# EAGLE board snarfbasev4a (EAGLE 6.4)
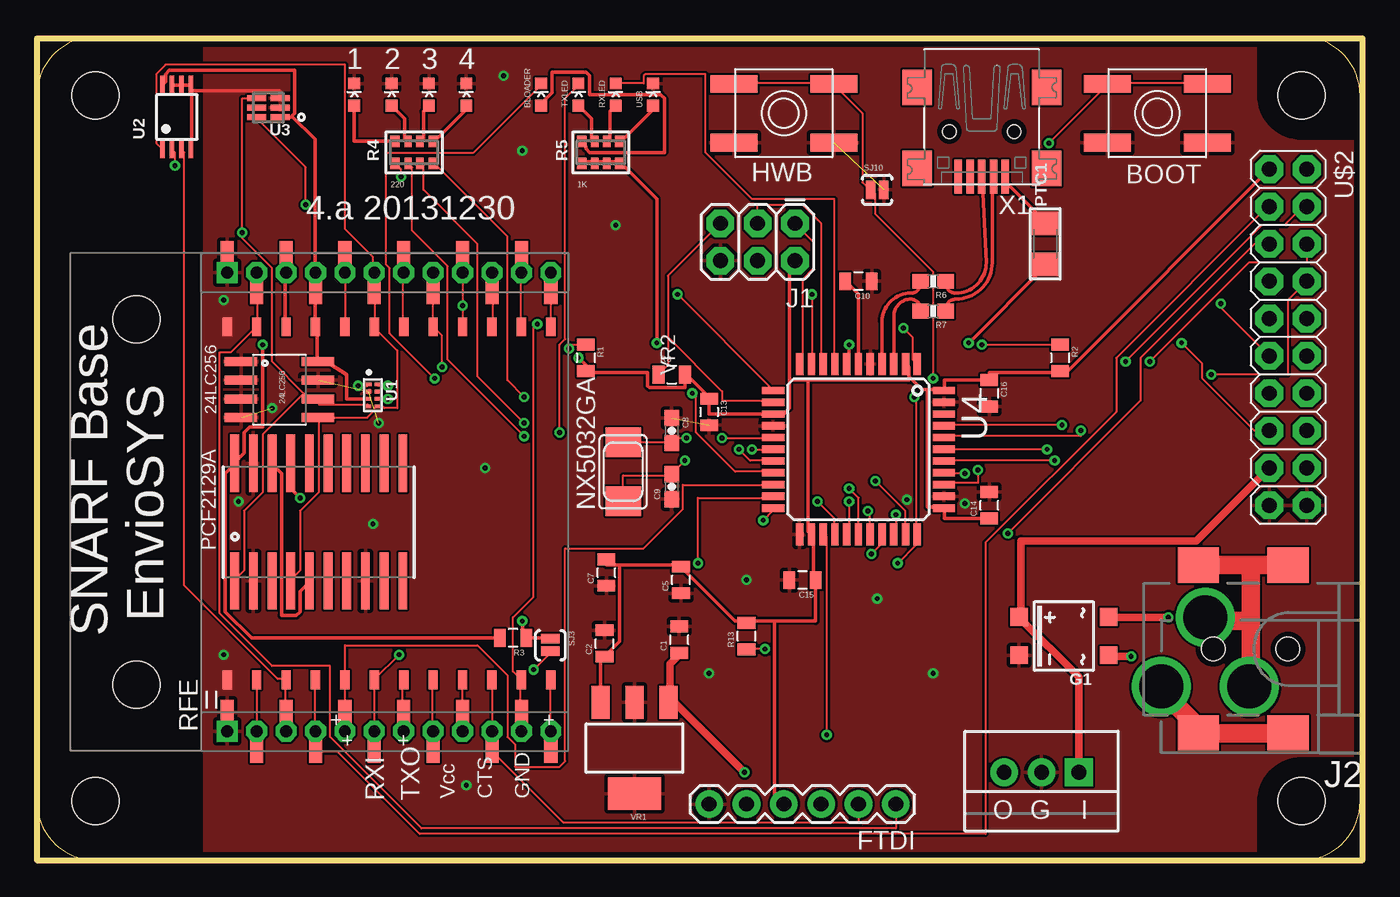
[diagram p0: board, top side]
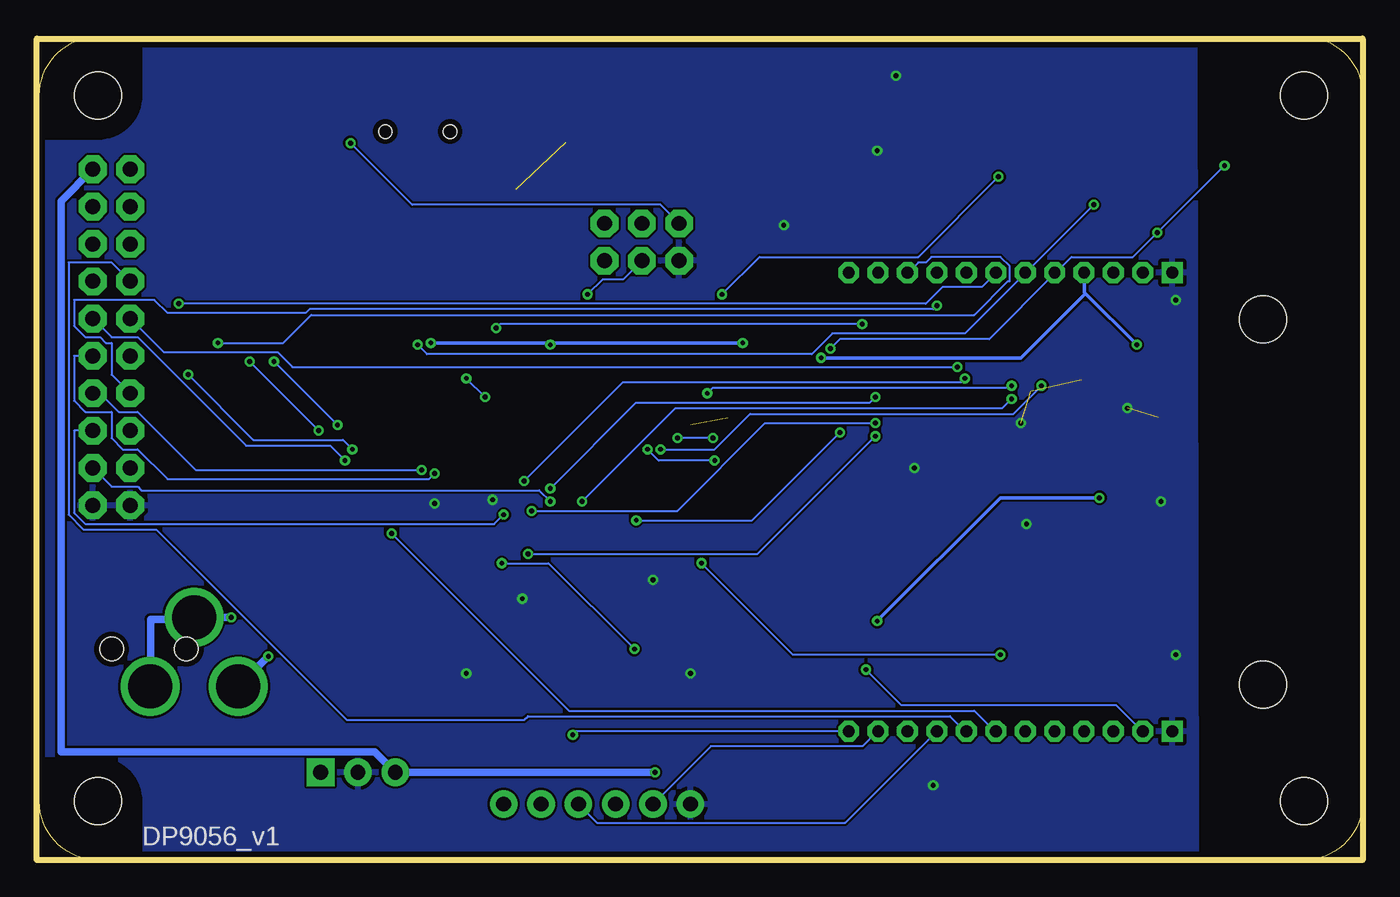
[diagram p1: board, bottom side, seen from below]

Size 90.17 x 55.88 mm. Coordinates in mm from the lower left corner, seen from the top.
Outline: 0,0 90.17,0 90.17,55.88 0,55.88 0,0
Copper layers (1*16): Top 0.0356mm / dielectric 1.5011mm / Bottom 0.0356mm
Design rules "LaenPCBOrder-JCModified": minimum track width 6mil, minimum drill 13mil, track to track 6mil, track to pad 6mil, pad to pad 6mil, via to via 6mil, smd to smd 6mil, copper to edge 15mil, drill to drill 6mil, minimum pad ring 12mil, minimum via ring 7mil, stop-mask expansion 4mil, vias tented up to drill 25mil, thermal gap 10mil
Net classes: 0 default: width 0.254 mm; 1 smallsignal: width 0.152 mm; 2 Power: width 0.508 mm; 3 medsignal: width 0.203 mm

## Footprints (pad centres in the part's own frame; a part is rotated, then mirrored left to right if it is on the bottom)
LED-0603 = smd 0.8 x 0.8: A 0,-0.75; C 0,0.75
SO08 = smd 0.61 x 2.21: 1 -1.905,-2.616; 2 -0.635,-2.616; 3 0.635,-2.616; 4 1.905,-2.616; 5 1.905,2.616; 6 0.635,2.616; 7 -0.635,2.616; 8 -1.905,2.616
EVQ-Q2 = smd 3.2 x 1.2: A -3.4,-2; A' 3.4,-2; B -3.4,2; B' 3.4,2
0805 = smd 0.8 x 1.2: 1 -0.9,0; 2 0.9,0
0603-CAP = smd 1.1 x 1: 1 -0.85,0; 2 0.85,0
1X06 = drill 1.016 pad 1.88: 1 0,0; 2 2.54,0; 3 5.08,0; 4 7.62,0; 5 10.16,0; 6 12.7,0
SOIC-4 = smd 1.2 x 1.2: + 1.3,3.05; - -1.3,3.05; ~1 -1.3,-3.05; ~2 1.3,-3.05
TO220-MURATA = drill 1 pad 1.88: GND 0,0; OUT 2.54,0 | drill 1 pad 1.88 square: IN -2.54,0
2X3 = drill 1.016 pad 1.88 octagon: 1 0,0; 2 0,2.54; 3 2.54,0; 4 2.54,2.54; 5 5.08,0; 6 5.08,2.54
POWER_JACK_COMBO = drill 2.997: GND 5.62,-2.16; GND@1 2.62,2.54; POWER 8.62,2.54 | smd 2.8 x 2.4: GND@3 0,-5.7; GND@4 6.1,-5.7; POWER@1 0,5.7; POWER@2 6.1,5.7 | hole 1.6: 0,0; 5.08,0
NX5032 = smd 2 x 2.4: P$1 2,0; P$2 -2,0
SO20W = smd 0.6 x 3.9: P$1 -5.715,-4; P$2 -4.445,-4; P$3 -3.175,-4; P$4 -1.905,-4; P$5 -0.635,-4; P$6 0.635,-4; P$7 1.905,-4; P$8 3.175,-4; P$9 4.445,-4; P$10 5.715,-4; P$11 5.715,4; P$12 4.445,4; P$13 3.175,4; P$14 1.905,4; P$15 0.635,4; P$16 -0.635,4; P$17 -1.905,4; P$18 -3.175,4; P$19 -4.445,4; P$20 -5.715,4
1206 = smd 1.6 x 1.8: 1 -1.4,0; 2 1.4,0
RESPACK_4X0603 = smd 0.65 x 0.8: 1 -1.3,-0.75; 4 1.3,-0.75; 5 1.3,0.75; 8 -1.3,0.75 | smd 0.5 x 0.8: 2 -0.4,-0.75; 3 0.4,-0.75; 6 0.4,0.75; 7 -0.4,0.75
0603-RES = smd 1.1 x 1: 1 -0.85,0; 2 0.85,0
SYNAPSERFENGINE-THM-SMT-JACK2 = drill 0.8 square: 1 0,0; 24 31.2,0 | drill 0.8 pad 1.422 octagon: 2 0,-2; 3 0,-4; 4 0,-6; 5 0,-8; 6 0,-10; 7 0,-12; 8 0,-14; 9 0,-16; 10 0,-18; 11 0,-20; 12 0,-22; 13 31.2,-22; 14 31.2,-20; 15 31.2,-18; 16 31.2,-16; 17 31.2,-14; 18 31.2,-12; 19 31.2,-10; 20 31.2,-8; 21 31.2,-6; 22 31.2,-4; 23 31.2,-2 | smd 1.67 x 0.89: P1 1.3,0; P2 -1.3,-2; P3 1.3,-4; P4 -1.3,-6; P5 1.3,-8; P6 -1.3,-10; P7 1.3,-12; P8 -1.3,-14; P9 1.3,-16; P10 -1.3,-18; P11 1.3,-20; P12 -1.3,-22; P13 29.9,-22; P14 32.5,-20; P15 29.9,-18; P16 32.5,-16; P17 29.9,-14; P18 32.5,-12; P19 29.9,-10; P20 32.5,-8; P21 29.9,-6; P22 32.5,-4; P23 29.9,-2; P24 32.5,0 | smd 1.27 x 0.635: P201 3.5,0; P202 3.5,-2; P203 3.5,-4; P204 3.5,-6; P205 3.5,-8; P206 3.5,-10; P207 3.5,-12; P208 3.5,-14; P209 3.5,-16; P210 3.5,-18; P211 3.5,-20; P212 3.5,-22; P213 27.5,-22; P214 27.5,-20; P215 27.5,-18; P216 27.5,-16; P217 27.5,-14; P218 27.5,-12; P219 27.5,-10; P220 27.5,-8; P221 27.5,-6; P222 27.5,-4; P223 27.5,-2; P224 27.5,0 | hole 3.2: 3.17,6.16; 28.03,6.16
SJ_2S-NOTRACE = smd 0.635 x 1.27: 1 -0.45,0; 2 0.4,0
SJ_2S-NO = smd 0.635 x 1.27: 1 -0.45,0; 2 0.45,0
SOT833-1 = smd 0.4 x 0.25: 1 0.275,-0.75 | smd 0.35 x 0.25: 2 0.3,-0.25; 3 0.3,0.25; 4 0.3,0.75; 5 -0.3,0.75; 6 -0.3,0.25; 7 -0.3,-0.25; 8 -0.3,-0.75
TSSOP8 = smd 1.2 x 0.305: 1 -2.2,0.975; 2 -2.2,0.325; 3 -2.2,-0.325; 4 -2.2,-0.975; 5 2.2,-0.975; 6 2.2,-0.325; 7 2.2,0.325; 8 2.2,0.975
TSL2561_FN = smd 1.3 x 0.4: ADR -0.8,0; CLK 0.8,-0.65; DATA 0.8,0.65; INT 0.8,0; VDD -0.8,0.65; VSS -0.8,-0.65
TQFP44 = smd 1.5 x 0.5: 1 -5.8,4; 2 -5.8,3.2; 3 -5.8,2.4; 4 -5.8,1.6; 5 -5.8,0.8; 6 -5.8,0; 7 -5.8,-0.8; 8 -5.8,-1.6; 9 -5.8,-2.4; 10 -5.8,-3.2; 11 -5.8,-4; 23 5.8,-4; 24 5.8,-3.2; 25 5.8,-2.4; 26 5.8,-1.6; 27 5.8,-0.8; 28 5.8,0; 29 5.8,0.8; 30 5.8,1.6; 31 5.8,2.4; 32 5.8,3.2; 33 5.8,4 | smd 0.5 x 1.5: 12 -4,-5.8; 13 -3.2,-5.8; 14 -2.4,-5.8; 15 -1.6,-5.8; 16 -0.8,-5.8; 17 0,-5.8; 18 0.8,-5.8; 19 1.6,-5.8; 20 2.4,-5.8; 21 3.2,-5.8; 22 4,-5.8; 34 4,5.8; 35 3.2,5.8; 36 2.4,5.8; 37 1.6,5.8; 38 0.8,5.8; 39 0,5.8; 40 -0.8,5.8; 41 -1.6,5.8; 42 -2.4,5.8; 43 -3.2,5.8; 44 -4,5.8
2X10 = drill 1.016 pad 1.88 octagon: 1 -11.43,-1.27; 2 -11.43,1.27; 3 -8.89,-1.27; 4 -8.89,1.27; 5 -6.35,-1.27; 6 -6.35,1.27; 7 -3.81,-1.27; 8 -3.81,1.27; 9 -1.27,-1.27; 10 -1.27,1.27; 11 1.27,-1.27; 12 1.27,1.27; 13 3.81,-1.27; 14 3.81,1.27; 15 6.35,-1.27; 16 6.35,1.27; 17 8.89,-1.27; 18 8.89,1.27; 19 11.43,-1.27; 20 11.43,1.27
DP9056_V1 = hole 3.2: 4,4; 86,4; 86,52; 4,52
SOT223 = smd 1.219 x 2.235: 1 -2.311,-3.099; 2 0,-3.099; 3 2.311,-3.099 | smd 3.6 x 2.2: 4 0,3.099
USB-MINIB = smd 0.5 x 2.308: D+ 0,4.064; D- -0.8,4.064; GND 1.6,4.064; ID 0.8,4.064; VBUS -1.6,4.064 | smd 2 x 2.4: GND1 -4.4,-2; GND2 -4.4,3.5; GND3 4.4,3.5; GND4 4.4,-2 | hole 0.9: -2.2,1; 2.2,1

## Placement (x,y rotation side)
1  red  [LED-0603]  21.59,52.07 0 top
2  red  [LED-0603]  24.13,52.07 0 top
3  red  [LED-0603]  26.67,52.07 0 top
4  red  [LED-0603]  29.21,52.07 0 top
24LC256  24LC256T-I/SN  [SO08]  16.51,32 270 top
BLOADER  RED  [LED-0603]  34.29,52.07 0 top
BOOT  EVQQ2  [EVQ-Q2]  76.2,50.8 180 top
C1  1uF  [0805]  43.69,14.99 90 top
C2  1uF  [0805]  38.61,14.73 90 top
C5  1uF  [0805]  43.81,19.05 90 top
C7  10uF  [0805]  38.73,19.56 90 top
C8  12pF  [0603-CAP]  43.18,29.21 270 top
C9  12pF  [0603-CAP]  43.18,25.4 90 top
C10  1uF  [0805]  55.88,39.37 180 top
C13  1uF  [0805]  45.72,30.48 270 top
C14  1uF  [0805]  64.77,24.13 90 top
C15  1uF  [0805]  52.07,19.05 180 top
C16  1uF  [0805]  64.77,31.75 270 top
FTDI  [1X06]  58.42,3.81 180 top
G1  [SOIC-4]  69.85,15.24 90 top
HWB  EVQQ2  [EVQ-Q2]  50.8,50.8 180 top
IC1  [TO220-MURATA]  68.33,5.97 180 top
J1  AVR_SPI_PRG_6PTH  [2X3]  51.56,43.31 180 top
J2  POWER_JACKCOMBO  [POWER_JACK_COMBO]  85.09,14.35 180 top
NX5032GA  8MHz  [NX5032]  39.88,26.42 90 top
PCF2129A  PCF2129ASO20  [SO20W]  19.18,22.99 0 top
PTC1  [1206]  68.58,41.91 90 top
R1  [0805]  37.34,34.16 270 top
R2  [0805]  69.6,34.16 270 top
R3  10k  [0805]  32.38,15.11 180 top
R4  220  [RESPACK_4X0603]  25.65,48.13 0 top
R5  1K  [RESPACK_4X0603]  38.35,48.13 0 top
R6  22  [0603-RES]  60.96,39.37 180 top
R7  22  [0603-RES]  60.96,37.34 180 top
R8  10K  [0805]  43.18,33.02 0 top
R13  10K  [0805]  48.26,15.24 90 top
RFE  RFE  [SYNAPSERFENGINE-THM-SMT-JACK2]  12.95,8.76 90 top
RXLED  yellow  [LED-0603]  39.37,52.07 0 top
SJ3  SOLDERJUMPERNC2  [SJ_2S-NOTRACE]  34.92,14.61 270 top
SJ10  HWB  [SJ_2S-NO]  57.15,45.59 0 top
TXLED  yellow  [LED-0603]  36.83,52.07 0 top
U1  [SOT833-1]  22.86,31.62 180 top
U2  lm75adp  [TSSOP8]  9.53,50.55 90 top
U3  TSL2561_DFN  [TSL2561_FN]  15.75,51.18 180 top
U4  ATMEGA32U4-AU  [TQFP44]  55.88,27.94 270 top
U$2  M10X2  [2X10]  85.09,35.56 270 top
U$3  [DP9056_V1]  0,0 0 top
USB  GREEN  [LED-0603]  41.91,52.07 0 top
VR1  MCP1826S  [SOT223]  40.64,7.62 180 top
X1  USBSMD  [USB-MINIB]  64.26,50.55 180 top

## Library data of the parts
1-4 BLOADER C1 C2 C5 C7 C10 C13-C16 PCF2129A R6 R7 RFE RXLED TXLED USB X1 = 0_jc-custom
24LC256 C8 C9 FTDI J1 R3 SJ3 SJ10 = SparkFun
BOOT HWB = adaprog
G1 PTC1 R4 R5 U1-U3 = microbuilder
IC1 = 0_jc-custom-eagle6
J2 U$2 = SparkFun-Connectors
NX5032GA U4 = adafruit
R1 R2 R8 R13 = SparkFun-Resistors
U$3 = dp_pcb
VR1 = SparkFun-PowerIC

## Nets
AREF-7: U4.42
ARXLED [smallsignal]: RXLED.C U4.8
ATXLED [smallsignal]: TXLED.C U4.22
GND: 1.C 2.C 3.C 4.C 24LC256.1 24LC256.2 24LC256.3 24LC256.4 24LC256.7 BOOT.B BOOT.B' C1.2 C2.2 C5.1 C7.1 C8.1 C9.1 C10.1 C13.2 C14.2 C15.2 C16.2 FTDI.6 G1.- HWB.B HWB.B' IC1.GND J1.6 PCF2129A.P$2 PCF2129A.P$8 PCF2129A.P$19 RFE.1 RFE.24 RFE.P1 RFE.P24 RFE.P201 RFE.P224 SJ10.2 U1.2 U2.4 U2.5 U2.6 U2.7 U3.ADR U3.VSS U4.5 U4.15 U4.23 U4.35 U4.43 U$2.19 U$2.20 USB.C VR1.2 VR1.4
GPIO0 [smallsignal]: RFE.2 RFE.P2 RFE.P202 SJ3.2
GPIO1 [smallsignal]: RFE.3 RFE.P3 RFE.P203 U2.3
GPIO2 [smallsignal]: RFE.4 RFE.P4 RFE.P204 U$2.3
GPIO5 [smallsignal]: RFE.7 RFE.P7 RFE.P207 U$2.5
GPIO6 [smallsignal]: RFE.8 RFE.P8 RFE.P208 U$2.7
GPIO11 [smallsignal]: RFE.13 RFE.P13 RFE.P213
GPIO12 [smallsignal]: RFE.14 RFE.P14 RFE.P214
GPIO13 [smallsignal]: RFE.15 RFE.P15 RFE.P215 U$2.15
GPIO14 [smallsignal]: RFE.16 RFE.P16 RFE.P216 U$2.13
GPIO15 [smallsignal]: RFE.17 RFE.P17 RFE.P217 U$2.9
GPIO16 [smallsignal]: RFE.18 RFE.P18 RFE.P218 U$2.11
GPIO19: RFE.22 RFE.P22 RFE.P222
HWB [smallsignal]: HWB.A HWB.A' R13.1 SJ10.1 U4.33
IFS: PCF2129A.P$5 PCF2129A.P$18
LINT: U3.INT
MISO [smallsignal]: J1.1 U4.11
MOSI [smallsignal]: J1.4 U4.10
N$1: 1.A R4.8
N$2: 2.A R4.7
N$3 [Power]: G1.~1 J2.POWER
N$4: C10.2 U4.6
N$5: BLOADER.A R5.8
N$6: 3.A R4.6
N$7 [Power]: G1.~2 J2.GND J2.GND@1
N$8: R5.7 TXLED.A
N$9: R5.6 RXLED.A
N$10: R5.5 USB.A
N$11: X1.GND
N$12: 4.A R4.5
PB4-L4-D8 [smallsignal]: R4.4 U4.28
PB5-L3-D9 [smallsignal]: R4.3 U4.29
PB6-L2-D10 [smallsignal]: R4.2 U4.30
PB7-L1-D11 [smallsignal]: R4.1 U4.12
PC6-D5 [smallsignal]: U4.31 U$2.16
PC7-D13-LED9BLOAD [smallsignal]: BLOADER.C U4.32
PD4-D4-GPIO10 [smallsignal]: RFE.12 RFE.P12 RFE.P212 U4.25
PD6-D12-I2COE [smallsignal]: U1.6 U4.26
PD7-D6 [smallsignal]: U4.27 U$2.18
PE6-D7-GPIO9 [smallsignal]: FTDI.5 RFE.11 RFE.P11 RFE.P211 U4.1
PF0-A5 [smallsignal]: U4.41 U$2.4
PF1-A4 [smallsignal]: U4.40 U$2.6
PF4-A3 [smallsignal]: U4.39 U$2.8
PF5-A2 [smallsignal]: U4.38 U$2.10
PF6-A1 [smallsignal]: U4.37 U$2.12
PF7-A0 [smallsignal]: U4.36 U$2.14
R6: PCF2129A.P$17 R3.1 SJ3.1
RESET_L [smallsignal]: FTDI.1 RFE.23 RFE.P23 RFE.P223
RST [smallsignal]: BOOT.A BOOT.A' J1.5 R8.1 U4.13
RX1 [smallsignal]: RFE.6 RFE.P6 RFE.P206 U4.21
RXI [smallsignal]: FTDI.3 RFE.9 RFE.P9 RFE.P209
SCK [smallsignal]: J1.3 U4.9
SCL3 [smallsignal]: 24LC256.6 PCF2129A.P$1 R1.1 RFE.20 RFE.P20 RFE.P220 U1.4 U2.2 U3.CLK
SCL5 [smallsignal]: U1.1 U4.18
SDA3 [smallsignal]: 24LC256.5 PCF2129A.P$4 R2.1 RFE.19 RFE.P19 RFE.P219 U1.5 U2.1 U3.DATA
SDA5 [smallsignal]: U1.8 U4.19
TX1 [smallsignal]: RFE.5 RFE.P5 RFE.P205 U4.20
TXO [smallsignal]: FTDI.2 RFE.10 RFE.P10 RFE.P210
UD_N: R7.2 U4.3
UD_P: R6.2 U4.4
UDM_N: R7.1 X1.D-
UDM_P: R6.1 X1.D+
UVCC: U1.7
VBUS: PTC1.1 R5.1 R5.2 R5.3 R5.4 U4.7
VBUSRAW: PTC1.2 X1.VBUS
VCC3: 24LC256.8 C2.1 C5.2 C7.2 C13.1 C14.1 C15.1 C16.1 FTDI.4 J1.2 PCF2129A.P$20 R1.2 R2.2 R3.2 R8.2 R13.2 RFE.21 RFE.P21 RFE.P221 U1.3 U2.8 U3.VDD U4.2 U4.14 U4.24 U4.34 U4.44 U$2.1 VR1.3
VCC5 [Power]: C1.1 IC1.OUT U$2.2 VR1.1
VCC12 [Power]: G1.+ IC1.IN U$2.17
XTAL1 [smallsignal]: C9.2 NX5032GA.P$2 U4.17
XTAL2 [smallsignal]: C8.2 NX5032GA.P$1 U4.16

## Tracks (layer width: path | path; a pad name or v marks a point on that pad's centre or on a via)
ARXLED
  Top 0.152: RXLED.C 39.37,52.83 41.27,52.83 41.27,53.34 41.4,53.47 45.47,53.47 45.47,48.13 48.64,44.96 54.23,44.96 54.23,33.78 U4.8
ATXLED  (via drill 0.33)
  Top 0.152: v35.56,29.08 35.56,35.05 35.94,35.43 35.94,51.82 36.83,52.7 TXLED.C | v49.4,23.11 50.04,23.75 50.04,23.88 U4.22
  Bottom 0.152: v35.56,29.08 41.53,23.11 v49.4,23.11
GND  (via drill 0.33)  (5 unrouted)
  Top 0.254: U2.7 9.27,52.7 9.78,52.7 U2.6 9.91,52.7 10.41,52.7 U2.5 | 10.54,52.32 10.54,52.7 U2.5 | 10.54,52.32 10.54,48.39 U2.4 | 10.54,52.32 16.51,52.32 16.51,51.94 U3.VSS | 10.54,52.32 U2.5 | 84.07,24.13 U$2.19
  other vias: 57.15,17.78 48.26,19.05 45.72,12.7 60.96,12.7 29.21,5.08 33.02,48.26 39.37,43.18 31.75,53.34 59.18,24.51 63.12,24.26 12.7,13.97 22.86,22.86 30.48,26.67 12.7,38.1 16,30.73 13.72,24.38 23.24,29.72
  pour Bottom: 11.43,56.26 89.66,56.13 89.66,0.51 11.3,0.51
  pour Top: 11.43,55.88 90.17,55.88 90.17,0 11.43,0
GPIO0  (via drill 0.33)
  Top 0.152: 14.99,8.76 14.99,12.19 RFE.P202 | v33.78,12.95 34.92,14.1 SJ3.2 | 14.99,8.76 14.99,7.49 RFE.P2 | 14.99,8.76 RFE.2
  Bottom 0.152: v33.78,12.95 31.37,10.54 16.76,10.54 14.99,8.76 RFE.2
GPIO1
  Top 0.152: RFE.3 16.89,8.76 16.89,10.03 RFE.P3 16.89,10.16 16.89,12.19 RFE.P203 16.89,12.32 16.38,12.32 10.03,18.67 10.03,48.13 9.91,48.26 U2.3
GPIO2
  Top 0.152: 18.92,8.76 18.92,12.19 RFE.P204 | 18.92,8.76 18.92,7.49 RFE.P4 19.05,7.37 20.45,7.37 26.04,1.78 64.52,1.78 64.52,21.59 73.41,30.48 73.41,34.16 83.69,44.45 U$2.3 | 18.92,8.76 RFE.4
GPIO5  (via drill 0.33)
  Top 0.152: RFE.P207 24.89,12.19 24.89,10.16 RFE.P7 24.89,10.03 24.89,8.76 RFE.7 | v66.04,22.23 75.06,31.24 75.06,34.16 82.8,41.91 U$2.5
  Bottom 0.152: v66.04,22.23 53.98,10.16 26.42,10.16 25.02,8.76 RFE.7
GPIO6
  Top 0.152: 26.92,8.76 26.92,12.19 RFE.P208 | 26.92,8.76 26.92,7.49 RFE.P8 | 26.92,8.76 RFE.8
  Bottom 0.152: U$2.7 85.09,40.64 88.01,40.64 88.01,23.5 87,22.48 82.04,22.48 69.09,9.53 57.02,9.53 56.77,9.78 28.07,9.78 27.05,8.76 RFE.8
GPIO11
  Top 0.152: RFE.P213 34.92,36.32 34.92,38.61 RFE.P13 34.92,38.73 34.92,39.88 RFE.13
GPIO12
  Top 0.152: RFE.P214 32.89,36.32 32.89,39.88 RFE.14 32.89,40.01 32.89,41.15 RFE.P14
GPIO13  (via drill 0.33)
  Top 0.152: RFE.P215 30.99,36.32 30.99,38.61 RFE.P15 30.99,38.73 30.99,39.88 RFE.15 | v77.85,35.18 79.25,33.78 79.25,32.77 82.8,29.21 U$2.15
  Bottom 0.152: v77.85,35.18 73.41,35.18 71.5,37.08 26.42,37.08 24.13,39.37 24,39.37 24,40.39 24.64,41.02 29.34,41.02 29.72,40.64 30.23,40.64 30.86,40.01 RFE.15
GPIO14  (via drill 0.33)
  Top 0.152: RFE.P216 28.96,36.32 v28.96,37.72 28.96,39.88 RFE.16 28.96,40.01 28.96,41.15 RFE.P16
  Bottom 0.152: U$2.13 85.09,33.02 85.09,35.18 85.47,35.18 85.85,35.56 86.87,35.56 87.63,36.32 87.63,38.1 82.17,38.1 81.28,37.21 71.88,37.21 71.63,37.47 29.21,37.47 v28.96,37.72
GPIO15  (via drill 0.33)
  Top 0.152: RFE.17 26.92,39.88 26.92,38.73 RFE.P17 26.92,38.61 26.92,36.32 RFE.P217 27.05,36.2 27.56,35.69 v27.56,33.53
  Bottom 0.152: v27.56,33.53 72.77,33.53 73.79,34.54 81.53,34.54 U$2.9
GPIO16  (via drill 0.33)
  Top 0.152: RFE.P218 24.89,36.32 24.89,39.88 RFE.18 24.89,40.01 24.89,41.15 RFE.P18 | U$2.11 80.52,37.59 v80.52,37.85
  Bottom 0.152: v80.52,37.85 29.72,37.85 28.57,38.99 25.91,38.99 25.02,39.88 RFE.18
GPIO19
  Top 0.254: RFE.P222 16.89,36.32 16.89,39.88 RFE.22 16.89,40.01 16.89,41.15 RFE.P22
HWB  (via drill 0.33)
  Top 0.152: HWB.A' 47.5,52.83 54.1,52.83 HWB.A 54.23,52.7 56.13,50.8 56.13,46.1 56.64,45.59 SJ10.1 56.77,45.59 57.02,45.34 57.02,43.94 60.96,40.01 v60.96,32.77 | v49.53,14.35 48.26,14.35 R13.1 | v58.55,20.19 59.82,21.46 59.82,22.1 U4.33 59.82,22.23 59.82,31.37 v59.69,31.5
  Bottom 0.152: v49.53,14.35 55.37,20.19 v58.55,20.19 | v59.69,31.5 v60.96,32.77
IFS
  Top 0.254: PCF2129A.P$5 18.54,18.92 17.91,18.29 17.91,16.89 17.65,16.64 16.64,16.64 16.64,26.29 16,26.92 PCF2129A.P$18
MISO
  Top 0.152: J1.1 52.83,42.04 52.83,40.26 52.07,39.5 52.07,33.91 51.94,33.78 U4.11
MOSI  (via drill 0.33)
  Top 0.152: v52.7,38.48 52.7,33.78 U4.10
  Bottom 0.152: v52.7,38.48 51.69,39.5 50.29,39.5 J1.4
N$1
  Top 0.254: 1.A 21.59,48.9 24.26,48.9 R4.8
N$2
  Top 0.254: R4.7 25.15,48.9 25.02,49.02 25.02,50.42 24.13,51.31 2.A
N$3  (via drill 0.33)
  Top 0.508: v74.42,13.84 73.03,13.84 G1.~1
  Bottom 0.508: v74.42,13.84 76.45,11.81 J2.POWER
N$4
  Top 0.254: U4.6 55.88,38.48 C10.2
N$5
  Top 0.254: R5.8 37.08,48.77 37.34,48.51 37.34,48.39 37.59,48.13 42.67,48.13 42.67,51.82 42.42,52.07 37.59,52.07 37.59,53.34 37.34,53.59 35.05,53.59 35.05,52.2 34.29,51.44 BLOADER.A
N$6
  Top 0.254: R4.6 26.16,48.9 26.29,49.02 26.29,50.93 26.67,51.31 3.A
N$7  (via drill 0.33)
  Top 0.508: v76.96,16.51 73.03,16.51 G1.~2
  Bottom 0.508: v76.96,16.51 79.38,16.51 J2.GND 79.63,16.38 82.42,16.38 82.42,11.81 J2.GND@1
N$8
  Top 0.254: R5.7 37.85,48.9 37.72,49.02 37.72,50.42 36.83,51.31 TXLED.A
N$9
  Top 0.254: R5.6 38.86,48.9 38.99,49.02 38.99,50.93 39.37,51.31 RXLED.A
N$10
  Top 0.254: USB.A 41.91,51.05 39.75,48.9 R5.5
N$12
  Top 0.254: 4.A 29.21,51.05 27.05,48.9 R4.5
PB4-L4-D8  (via drill 0.33)
  Top 0.152: v33.15,31.5 32,32.64 32,42.42 27.05,47.37 R4.4 | v55.24,25.27 55.88,24.64 U4.28
  Bottom 0.152: v33.15,31.5 33.53,31.11 49.4,31.11 v55.24,25.27
PB5-L3-D9  (via drill 0.33)
  Top 0.152: v33.15,29.72 29.97,32.89 29.97,41.91 26.29,45.59 26.29,47.24 26.16,47.37 R4.3 | v56.52,23.75 56.64,23.62 56.64,22.23 U4.29
  Bottom 0.152: v33.15,29.72 40.64,29.72 46.61,23.75 v56.52,23.75
PB6-L2-D10  (via drill 0.33)
  Top 0.152: v33.15,28.83 27.94,34.04 27.94,40.39 25.53,42.8 25.53,47.12 25.27,47.37 R4.2 | v56.77,20.83 57.4,21.46 57.4,22.1 U4.30
  Bottom 0.152: v33.15,28.83 41.15,20.83 v56.77,20.83
PB7-L1-D11  (via drill 0.33)
  Top 0.152: v24.77,46.48 24.77,46.99 24.38,47.37 R4.1 | v43.56,38.48 50.04,32 U4.12
  Bottom 0.152: v24.77,46.48 30.23,41.02 41.02,41.02 v43.56,38.48
PC6-D5  (via drill 0.33)
  Top 0.152: v58.42,23.5 58.42,22.35 58.29,22.23 U4.31
  Bottom 0.152: v58.42,23.5 59.05,22.86 86.87,22.86 87.63,23.62 87.63,29.21 U$2.16
PC7-D13-LED9BLOAD  (via drill 0.33)
  Top 0.152: v27.05,32.77 24,35.81 24,40.26 23.75,40.51 23.75,48.13 29.72,48.13 34.29,52.7 BLOADER.C | v57.02,25.78 59.05,23.75 59.05,22.23 U4.32
  Bottom 0.152: v27.05,32.77 27.3,32.51 50.29,32.51 v57.02,25.78
PD4-D4-GPIO10  (via drill 0.33)
  Top 0.152: 34.92,8.76 34.92,12.19 RFE.P212 | v53.72,8.51 53.72,21.97 53.59,22.1 U4.25 | 34.92,8.76 34.92,7.49 RFE.P12 | 34.92,8.76 RFE.12
  Bottom 0.152: v53.72,8.51 53.47,8.76 RFE.12
PD6-D12-I2COE  (via drill 0.33)
  Top 0.152: v23.88,31.37 23.24,31.37 U1.6 | v53.09,24.38 54.23,23.24 54.23,22.23 U4.26
  Bottom 0.152: v23.88,31.37 24.51,30.73 46.74,30.73 v53.09,24.38
PD7-D6  (via drill 0.33)
  Top 0.152: v55.24,24.38 55.24,22.35 55.12,22.23 U4.27
  Bottom 0.152: v55.24,24.38 56.01,25.15 83.06,25.15 83.31,25.4 85.09,25.4 U$2.18
PE6-D7-GPIO9  (via drill 0.33)
  Top 0.152: v58.93,36.2 59.56,35.56 59.56,34.04 59.82,33.78 U4.1 | v34.04,36.45 33.78,36.2 33.78,17.91 32.38,16.51 32.38,12.83 32.89,12.32 RFE.P211 32.89,12.19 32.89,10.16 RFE.P11 33.02,10.03 33.02,8.76 RFE.11
  Bottom 0.152: v58.93,36.2 58.67,36.45 v34.04,36.45 | FTDI.5 44.32,7.75 34.04,7.75 33.02,8.76 RFE.11
PF0-A5  (via drill 0.33)
  Top 0.152: v69.72,29.59 61.72,29.59 U4.41 | v74.04,33.91 83.31,43.18 84.96,43.18 84.96,43.31 86.11,44.45 U$2.4
  Bottom 0.152: v74.04,33.91 v69.72,29.59
PF1-A4  (via drill 0.33)
  Top 0.152: v70.99,29.21 70.99,28.83 61.72,28.83 U4.40 | v75.69,33.91 82.42,40.64 86.36,40.64 U$2.6
  Bottom 0.152: v75.69,33.91 v70.99,29.21
PF4-A3  (via drill 0.33)
  Top 0.152: v68.71,27.94 U4.39 | v79.88,33.02 85.09,33.02 85.09,38.1 U$2.8
  Bottom 0.152: v68.71,27.94 69.34,28.57 75.44,28.57 v79.88,33.02
PF5-A2  (via drill 0.33)
  Top 0.152: v69.22,27.18 61.72,27.18 U4.38
  Bottom 0.152: v69.22,27.18 70.23,28.19 75.95,28.19 83.31,35.56 85.09,35.56 U$2.10
PF6-A1  (via drill 0.33)
  Top 0.152: v63.12,26.29 61.72,26.29 U4.37
  Bottom 0.152: v63.12,26.29 63.5,25.91 81.28,25.91 83.31,27.94 84.33,27.94 85.09,28.7 85.09,30.48 86.87,30.48 87.63,31.24 87.63,34.29 U$2.12
PF7-A0  (via drill 0.33)
  Top 0.152: v64.01,26.54 64.01,25.65 61.72,25.65 U4.36
  Bottom 0.152: v64.01,26.54 79.38,26.54 83.31,30.48 84.58,30.48 85.85,31.75 U$2.14
R6  (via drill 0.33)
  Top 0.254: SJ3.1 34.92,15.11 R3.1 33.02,15.37 v33.02,16.26 | v17.91,24.64 17.27,25.27 PCF2129A.P$17
  Bottom 0.254: v33.02,16.26 24.64,24.64 v17.91,24.64
RESET_L
  Top 0.152: RFE.23 14.99,39.88 14.99,38.73 RFE.P23 14.99,38.61 14.99,36.32 RFE.P223 14.86,36.2 13.21,34.54 12.45,34.54 12.45,16.76 16,13.21 19.94,13.21 19.94,8.38 26.16,2.16 58.42,2.16 FTDI.1
RST  (via drill 0.33)
  Top 0.152: BOOT.A 79.5,52.83 72.9,52.83 BOOT.A' 72.77,52.7 v68.83,48.77 | 42.93,35.56 42.93,39.75 J1.5 | 42.93,35.56 42.93,33.66 R8.1 | 42.93,35.56 46.61,31.88 46.61,31.24 50.04,31.24 U4.13
  Bottom 0.152: v68.83,48.77 64.64,44.58 47.75,44.58 J1.5
RX1  (via drill 0.33)
  Top 0.152: 22.99,8.76 22.99,12.19 RFE.P206 22.99,12.32 v24.64,13.97 | v44.96,20.19 44.96,24.64 50.04,24.64 U4.21 | 22.99,8.76 22.99,7.49 RFE.P6 | 22.99,8.76 RFE.6
  Bottom 0.152: v44.96,20.19 38.73,13.97 v24.64,13.97
RXI
  Top 0.152: RFE.P209 28.96,12.19 28.96,10.16 RFE.P9 28.96,10.03 RFE.9
  Bottom 0.152: FTDI.3 52.07,2.54 35.18,2.54 RFE.9
SCK
  Top 0.152: J1.3 49.02,44.58 52.07,44.58 53.34,43.31 53.34,33.91 53.47,33.78 U4.9
SCL3  (via drill 0.33)
  Top 0.152: v9.4,47.24 9.4,48.13 9.27,48.26 U2.2 | v36.2,34.8 36.2,35.05 R1.1 | RFE.P220 20.95,36.32 20.95,39.88 RFE.20 20.95,40.01 20.95,41.15 RFE.P20 | U1.4 22.48,30.99 19.18,30.99 19.18,31.37 24LC256.6 18.54,31.37 18.16,31.75 | 18.16,31.75 16,33.91 16,40.26 13.97,42.29 v13.97,42.67 13.97,51.82 14.86,51.82 U3.CLK | 18.16,31.75 15.37,28.96 15.37,25.02 14.1,23.75 14.1,19.68 13.46,19.05 PCF2129A.P$1
  Bottom 0.152: v9.4,47.24 v13.97,42.67 15.62,41.02 19.81,41.02 20.83,40.01 RFE.20 20.95,39.88 25.4,35.43 35.56,35.43 v36.2,34.8
SCL5  (via drill 0.33)
  Top 0.152: v21.84,32.26 22.48,32.26 U1.1 | v47.75,27.94 48.51,27.18 50.04,27.18 U4.18
  Bottom 0.152: v21.84,32.26 23.75,30.35 41.66,30.35 44.07,27.94 v47.75,27.94
SDA3  (via drill 0.33)
  Top 0.152: 19.18,30.1 22.48,30.1 22.99,30.61 22.99,30.73 23.11,30.86 U1.5 23.24,30.86 23.5,30.86 23.62,30.73 24.51,30.73 24.51,34.67 22.99,36.2 RFE.P219 22.99,36.32 22.99,38.61 RFE.P19 22.99,38.73 22.99,39.88 RFE.19 22.86,40.01 22.86,41.02 20.95,42.93 20.95,54.1 8.76,54.1 8.13,53.47 8.13,48.77 U2.1 | v64.26,35.05 R2.1 | v18.29,44.58 18.29,47.12 14.99,50.42 U3.DATA | 19.18,30.1 19.18,25.02 17.91,23.75 17.91,19.68 17.27,19.05 PCF2129A.P$4 | 19.18,30.1 24LC256.5
  Bottom 0.152: v64.26,35.05 63.63,34.42 37.47,34.42 36.07,35.81 27.05,35.81 22.99,39.88 RFE.19 22.86,40.01 v18.29,44.58
SDA5  (via drill 0.33)
  Top 0.152: v23.88,32.26 23.24,32.26 U1.8 | v44.58,31.75 44.83,31.5 44.83,29.08 47.5,26.42 50.04,26.42 U4.19
  Bottom 0.152: v23.88,32.26 24,32.13 44.2,32.13 v44.58,31.75
TX1
  Top 0.152: U4.20 50.04,25.53 43.94,25.53 43.94,23.88 41.27,21.21 35.94,21.21 35.94,6.73 35.56,6.35 32.51,6.35 32.51,7.87 32,8.38 32,12.57 29.97,14.61 20.95,14.61 20.95,12.32 RFE.P205 20.95,12.19 20.95,10.16 RFE.P5 20.95,10.03 RFE.5
TXO
  Top 0.152: 30.99,8.76 30.99,12.19 RFE.P210 | 30.99,8.76 30.99,7.49 RFE.P10 30.99,7.37 35.81,2.54 55.88,2.54 FTDI.2 | 30.99,8.76 RFE.10
UD_N
  Top 0.254: U4.3 58.28,36.99 arc-90 59.44,38.15 arc-101 R7.2
UD_P
  Top 0.254: U4.4 57.48,36.6 arc-90 59.44,38.56 arc101 R6.2
UDM_N
  Top 0.254: X1.D- arc90 64.97,46.39 64.97,40.64 arc-90 62.48,38.15 arc90 61.81,37.48 R7.1
UDM_P
  Top 0.254: X1.D+ arc-90 64.31,46.05 64.57,40.64 arc-90 62.48,38.56 arc-90 61.81,39.23 R6.1
VBUS  (via drill 0.33)
  Top 0.254: R5.1 37.08,47.5 37.85,47.5 R5.2 37.97,47.5 38.73,47.5 R5.3 38.86,47.5 39.62,47.5 R5.4 39.75,47.37 42.16,44.96 v42.16,35.18 | v55.24,35.05 55.24,33.91 55.12,33.78 U4.7 | v63.37,35.18 68.58,40.39 PTC1.1
  Bottom 0.254: v63.37,35.18 55.37,35.18 v55.24,35.05 55.24,35.18 v42.16,35.18
VBUSRAW
  Top 0.254: PTC1.2 68.58,43.43 65.91,46.1 65.91,46.48 X1.VBUS
VCC3  (via drill 0.33)
  Top 0.254: R3.2 14.61,15.11 12.83,16.89 12.83,26.29 13.46,26.92 PCF2129A.P$20 13.46,27.05 14.1,27.69 14.1,29.08 14.48,29.46 15.37,29.46 v15.37,35.05 | U2.8 8.76,52.96 8.76,53.47 9.02,53.72 17.53,53.72 17.53,50.8 17.34,50.61 | 17.34,50.61 17.27,50.55 16.64,50.55 U3.VDD | U1.3 22.48,31.37 21.08,31.37 21.08,33.02 19.68,33.91 24LC256.8 19.05,33.91 19.05,36.2 RFE.P221 18.92,36.32 18.92,38.61 RFE.P21 18.92,38.73 18.92,39.88 RFE.21 18.92,40.01 18.92,49.02 17.34,50.61 | VR1.3 38.35,10.79 38.35,13.46 38.61,13.72 C2.1 38.61,13.84 39.62,14.86 39.62,20.07 | 39.62,20.07 38.73,20.07 C7.2 | 39.62,20.07 43.81,20.07 C5.2 47.5,16.26 48.26,16.26 | 50.16,16.26 52.96,16.26 C15.1 | 50.16,16.26 48.26,16.26 | C15.1 52.83,19.18 52.83,21.97 52.7,22.1 U4.24 52.58,22.23 52.45,22.35 52.45,32.64 | C15.1 | FTDI.4 50.16,4.45 50.16,16.26 | 48.26,16.26 R13.2 | J1.2 51.18,40.39 51.18,32.64 | 51.18,32.64 51.18,30.73 50.8,30.35 50.16,30.35 U4.14 50.04,30.35 45.72,30.35 C13.1 45.72,31.5 44.2,33.02 R8.2 44.07,32.13 41.66,32.13 41.53,32.26 41.53,33.15 37.34,33.15 R1.2 37.34,33.66 v36.83,34.16 | C14.1 61.72,23.24 61.72,23.88 U4.34 61.59,24 60.58,24 60.58,32 | 59.37,32.83 60.2,32 60.58,32 | 59.37,32.83 59.31,32.89 59.31,33.53 59.18,33.66 U4.2 | 60.58,32 61.59,32 U4.44 61.72,32 61.72,32.64 C16.1 64.77,33.15 69.6,33.15 R2.2 69.6,33.27 70.1,33.27 U$2.1 | 52.45,32.64 59.31,32.64 59.31,32.77 59.37,32.83 | 52.45,32.64 51.18,32.64
  Bottom 0.254: 18.86,38.54 18.92,38.61 18.92,39.88 RFE.21 | 18.86,38.54 v15.37,35.05 | 18.86,38.54 23.24,34.16 v36.83,34.16
VCC5  (via drill 0.33)
  Top 0.508: C1.1 43.69,13.97 43.05,13.34 43.05,10.79 VR1.1 43.31,10.79 v48.13,5.97
  Bottom 0.508: v48.13,5.97 IC1.OUT 67.18,7.37 88.52,7.37 88.52,44.83 U$2.2
VCC12
  Top 0.508: IC1.IN 70.87,12.45 66.8,16.51 G1.+ 66.93,16.76 66.93,21.72 78.87,21.72 U$2.17
XTAL1  (via drill 0.33)
  Top 0.152: NX5032GA.P$2 39.88,26.16 43.18,26.16 C9.2 43.18,26.29 v44.07,27.18 | v48.64,27.94 U4.17
  Bottom 0.152: v48.64,27.94 47.88,27.18 v44.07,27.18
XTAL2  (via drill 0.33)
  Top 0.152: 43.18,28.45 39.88,28.45 NX5032GA.P$1 | v46.61,28.7 50.04,28.7 U4.16 | v44.2,28.7 43.18,28.7 43.18,28.45 | 43.18,28.45 C8.2
  Bottom 0.152: v44.2,28.7 v46.61,28.7

## Text on the board
tPlace: 4.a 20131230 | 24LC256 | VR2 | SNARF Base / EnvioSYS | = | + | + | + | + | RXI | TXO | Vcc | CTS | GND